# EAGLE board VERSION_2 (EAGLE 9.1.3)
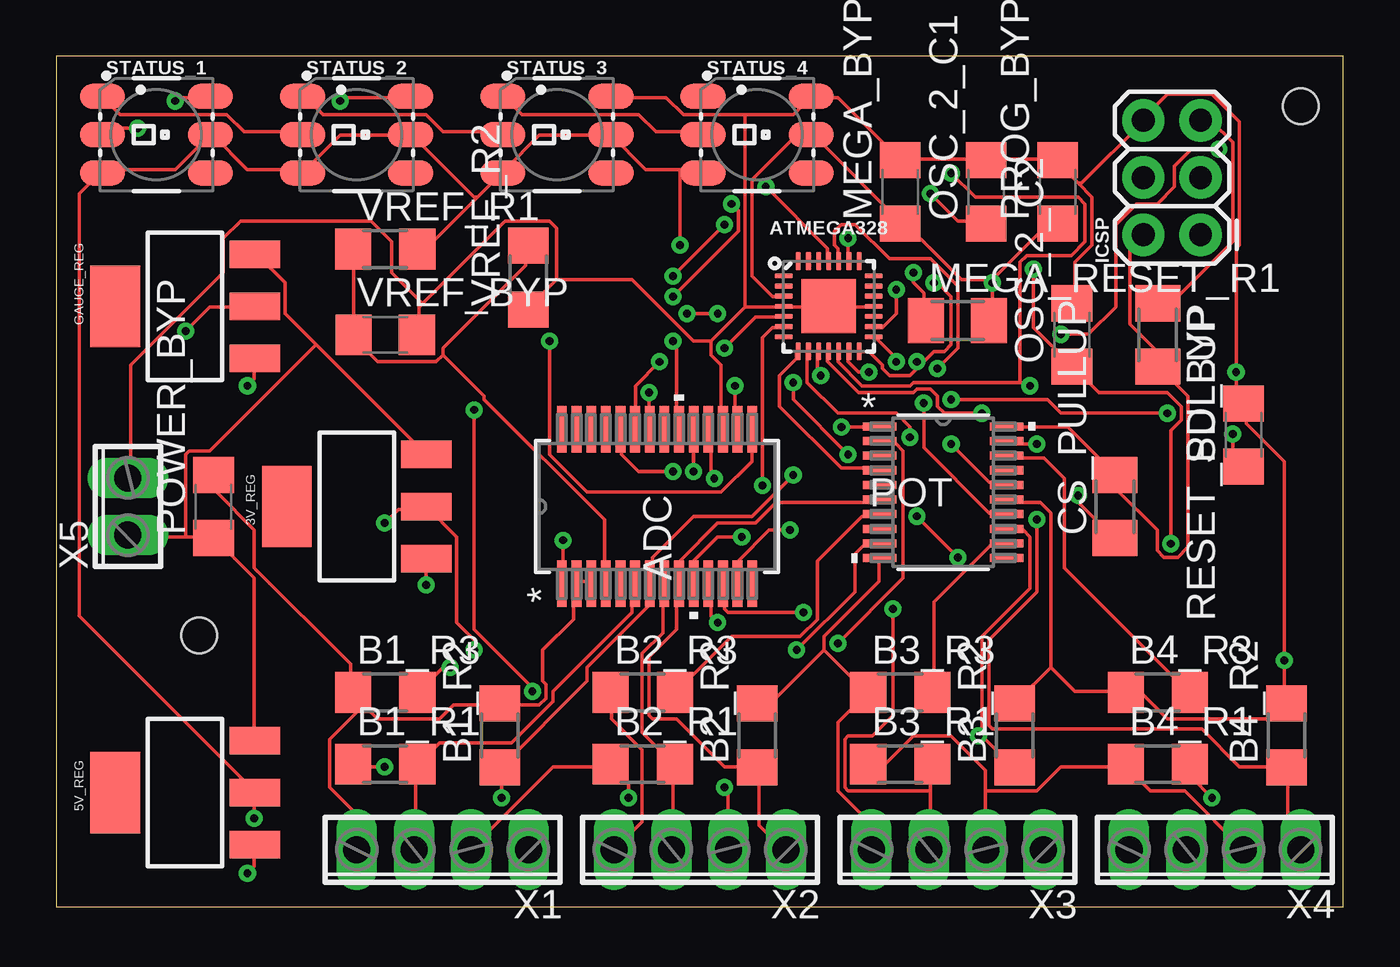
[diagram p0: board, top side]
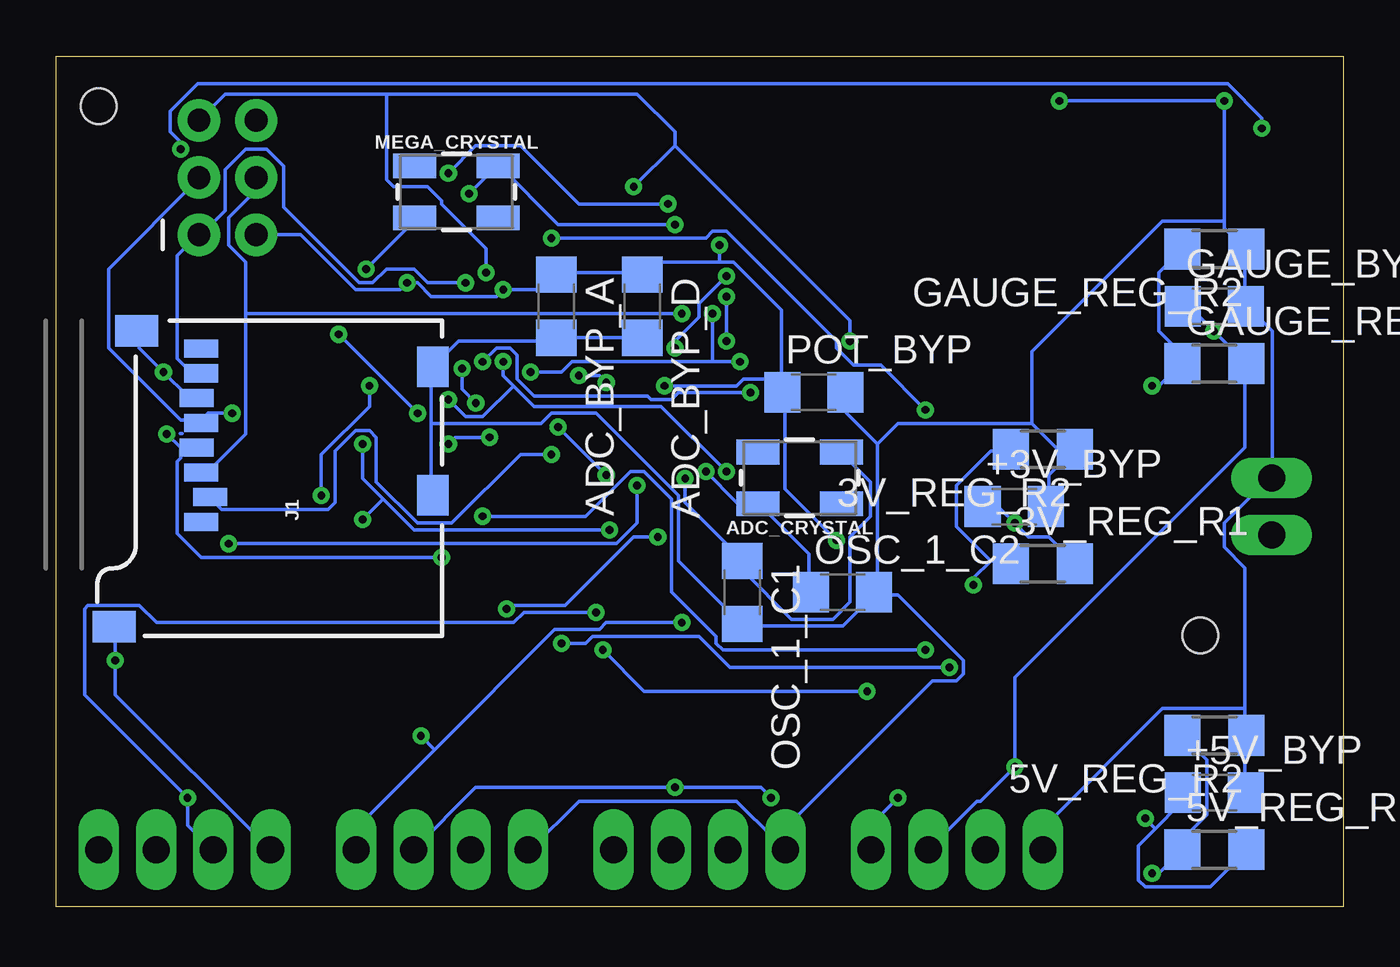
[diagram p1: board, bottom side, seen from below]

Size 57.13 x 37.77 mm. Coordinates in mm from the lower left corner, seen from the top.
Outline: 0,0 57.13,0 57.13,37.77 0,37.77 0,0
Copper layers (1*16): Top 0.035mm / dielectric 1.5mm / Bottom 0.035mm
Design rules "default": minimum track width 6mil, minimum drill 0.35mm, track to track 6mil, track to pad 6mil, pad to pad 6mil, via to via 6mil, smd to smd 6mil, copper to edge 40mil, drill to drill 6mil, minimum pad ring 10mil, minimum via ring 8mil, stop-mask expansion 4mil, vias tented up to drill 0mil, thermal gap 10mil
Holes 1.59 mm at 55.24,35.56 6.35,12.06

## Footprints (pad centres in the part's own frame; a part is rotated, then mirrored left to right if it is on the bottom)
SOT223 = smd 1.219 x 2.235: 1 -2.311,-3.099; 2 0,-3.099; 3 2.311,-3.099 | smd 3.6 x 2.2: 4 0,3.099
R1206 = smd 1.6 x 1.803: 1 -1.422,0; 2 1.422,0
C1206 = smd 1.6 x 1.8: 1 -1.4,0; 2 1.4,0
DB28 = smd 2.057 x 0.432: 1 -3.429,4.225; 2 -3.429,3.575; 3 -3.429,2.925; 4 -3.429,2.275; 5 -3.429,1.625; 6 -3.429,0.975; 7 -3.429,0.325; 8 -3.429,-0.325; 9 -3.429,-0.975; 10 -3.429,-1.625; 11 -3.429,-2.275; 12 -3.429,-2.925; 13 -3.429,-3.575; 14 -3.429,-4.225; 15 3.429,-4.225; 16 3.429,-3.575; 17 3.429,-2.925; 18 3.429,-2.275; 19 3.429,-1.625; 20 3.429,-0.975; 21 3.429,-0.325; 22 3.429,0.325; 23 3.429,0.975; 24 3.429,1.625; 25 3.429,2.275; 26 3.429,2.925; 27 3.429,3.575; 28 3.429,4.225
CRYSTAL-SMD-5X3.2-4PAD = smd 1.9 x 1.1: 1 -1.85,-1.15; 2 1.85,-1.15; 3 1.85,1.15; 4 -1.85,1.15
VQFN-28 = smd 0.82 x 0.24: 1 -2,1.35; 2 -2,0.9; 3 -2,0.45; 4 -2,0; 5 -2,-0.45; 6 -2,-0.9; 7 -2,-1.35; 15 2,-1.35; 16 2,-0.9; 17 2,-0.45; 18 2,0; 19 2,0.45; 20 2,0.9; 21 2,1.35 | smd 0.24 x 0.82: 8 -1.35,-2; 9 -0.9,-2; 10 -0.45,-2; 11 0,-2; 12 0.45,-2; 13 0.9,-2; 14 1.35,-2; 22 1.35,2; 23 0.9,2; 24 0.45,2; 25 0,2; 26 -0.45,2; 27 -0.9,2; 28 -1.35,2 | smd 2.4 x 2.4: PAD 0,0
M1206 = smd 1.6 x 2: 1 -1.4,0; 2 1.4,0
2X3 = drill 1.016 pad 1.88: 1 0,0; 2 0,2.54; 3 2.54,0; 4 2.54,2.54; 5 5.08,0; 6 5.08,2.54
MICRO-SD-SOCKET = smd 1.8 x 1.4: CD1 -2.05,0.4; CD2 -7.75,0.4 | smd 0.8 x 1.5: CS -7.84,10.3; DI -6.74,10.7; DO -2.34,10.7; GND -3.44,10.9; RSV1 -8.94,10.7; RSV2 -1.24,10.7; SCLK -4.54,10.7; VCC -5.64,10.9 | smd 1.4 x 1.9: GND1 -13.6,14.55; GND3 -0.45,13.55
RU_20 = smd 1.473 x 0.356: 1 -2.819,2.925; 2 -2.819,2.275; 3 -2.819,1.625; 4 -2.819,0.975; 5 -2.819,0.325; 6 -2.819,-0.325; 7 -2.819,-0.975; 8 -2.819,-1.625; 9 -2.819,-2.275; 10 -2.819,-2.925; 11 2.819,-2.925; 12 2.819,-2.275; 13 2.819,-1.625; 14 2.819,-0.975; 15 2.819,-0.325; 16 2.819,0.325; 17 2.819,0.975; 18 2.819,1.625; 19 2.819,2.275; 20 2.819,2.925
LED-TRICOLOR-5050-IC = smd 2 x 1.1: 1 -2.4,1.7; 2 -2.4,0; 3 -2.4,-1.7; 4 2.4,-1.7; 5 2.4,0; 6 2.4,1.7
4POL254 = drill 1.2 long: 1 -3.81,0; 2 -1.27,0; 3 1.27,0; 4 3.81,0
2POL254 = drill 1.2 long: 1 -1.27,0; 2 1.27,0

## Placement (x,y rotation side)
3V_REG  [SOT223]  13.34,17.78 90 top
3V_REG_R1  240  [R1206]  13.34,15.24 0 bottom
3V_REG_R2  390  [R1206]  13.34,20.32 180 bottom
5V_REG  [SOT223]  5.71,5.08 90 top
5V_REG_R1  240  [R1206]  5.71,2.54 0 bottom
5V_REG_R2  720  [R1206]  5.71,7.62 180 bottom
+3V_BYP  22uF  [C1206]  14.61,17.78 0 bottom
+5V_BYP  22uF  [C1206]  5.71,5.08 0 bottom
ADC  ADS1256IDBR  [DB28]  26.67,17.78 90 top
ADC_BYP_A  22uF  [C1206]  34.92,26.67 270 bottom
ADC_BYP_D  22uF  [C1206]  31.11,26.67 270 bottom
ADC_CRYSTAL  8MHz  [CRYSTAL-SMD-5X3.2-4PAD]  24.13,19.05 180 bottom
ATMEGA328  ATMEGA328P_VQFNVQFN  [VQFN-28]  34.29,26.67 0 top
B1_R1  350  [R1206]  14.61,6.35 0 top
B1_R2  370  [R1206]  19.68,7.62 90 top
B1_R3  5k  [R1206]  14.61,9.53 0 top
B2_R1  350  [R1206]  26.04,6.35 0 top
B2_R2  370  [R1206]  31.11,7.62 90 top
B2_R3  5k  [R1206]  26.04,9.53 0 top
B3_R1  350  [R1206]  37.47,6.35 0 top
B3_R2  370  [R1206]  42.55,7.62 90 top
B3_R3  5k  [R1206]  37.47,9.53 0 top
B4_R1  350  [R1206]  48.9,6.35 0 top
B4_R2  370  [R1206]  54.61,7.62 90 top
B4_R3  5k  [R1206]  48.9,9.53 0 top
CS_PULLUP  1K  [M1206]  46.99,17.78 90 top
GAUGE_BYP  22uF  [C1206]  5.71,26.67 0 bottom
GAUGE_REG  [SOT223]  5.71,26.67 90 top
GAUGE_REG_R1  240  [R1206]  5.71,24.13 0 bottom
GAUGE_REG_R2  ??  [R1206]  5.71,29.21 180 bottom
ICSP  [2X3]  50.8,29.84 90 top
J1  MICRO-SD_CARD_SOCKET  [MICRO-SD-SOCKET]  40.01,26.04 90 bottom
MEGA_BYP  22uF  [C1206]  37.47,31.75 90 top
MEGA_CRYSTAL  16MHz  [CRYSTAL-SMD-5X3.2-4PAD]  39.37,31.75 0 bottom
MEGA_RESET_R1  10k  [M1206]  40.01,26.04 0 top
OSC_1_C1  22pF  [C1206]  26.67,13.97 270 bottom
OSC_1_C2  22pF  [C1206]  22.23,13.97 0 bottom
OSC_2_C1  22uF  [C1206]  41.27,31.75 90 top
OSC_2_C2  22uF  [C1206]  45.09,25.4 90 top
POT  AD5254BRUZ1  [RU_20]  39.37,18.41 0 top
POT_BYP  22uF  [C1206]  23.5,22.86 0 bottom
POWER_BYP  22uF  [C1206]  6.99,17.78 90 top
PROG_BYP  22uF  [C1206]  44.45,31.75 90 top
RESET_PULLUP  1K  [M1206]  48.9,25.4 270 top
SD_BYP  22uF  [C1206]  52.7,20.95 90 top
STATUS_1  WS2812  [LED-TRICOLOR-5050-IC]  4.45,34.29 0 top
STATUS_2  WS2812  [LED-TRICOLOR-5050-IC]  13.34,34.29 0 top
STATUS_3  WS2812  [LED-TRICOLOR-5050-IC]  22.23,34.29 0 top
STATUS_4  WS2812  [LED-TRICOLOR-5050-IC]  31.11,34.29 0 top
VREF_BYP  22uF  [C1206]  14.61,25.4 0 top
VREF_R1  240  [R1206]  14.61,29.21 0 top
VREF_R2  27  [R1206]  20.95,27.94 90 top
X1  [4POL254]  17.14,2.54 180 top
X2  [4POL254]  28.57,2.54 180 top
X3  [4POL254]  40.01,2.54 180 top
X4  [4POL254]  51.44,2.54 180 top
X5  [2POL254]  3.17,17.78 90 top

## Library data of the parts
3V_REG 5V_REG GAUGE_REG = SparkFun-IC-Power
3V_REG_R1 3V_REG_R2 5V_REG_R1 5V_REG_R2 GAUGE_REG_R1 GAUGE_REG_R2 = rcl; SPICEPREFIX: R
+3V_BYP +5V_BYP ADC_BYP_A ADC_BYP_D B1_R1-B1_R3 B2_R1-B2_R3 B3_R1-B3_R3 B4_R1-B4_R3 CS_PULLUP GAUGE_BYP MEGA_BYP MEGA_RESET_R1 OSC_1_C1 OSC_1_C2 OSC_2_C1 OSC_2_C2 POT_BYP POWER_BYP PROG_BYP RESET_PULLUP SD_BYP VREF_BYP VREF_R1 VREF_R2 = resistor
ADC = ADS1256; MANUFACTURER_PART_NUMBER: ADS1256IDBR; VENDOR: Texas Instruments
ADC_CRYSTAL MEGA_CRYSTAL = SparkFun-Clocks; PROD_ID: XTAL-09431
ATMEGA328 = SparkFun-IC-Microcontroller
ICSP = SparkFun-Connectors; PROD_ID: CONN-11566
J1 = SparkFun-Connectors; PROD_ID: CONN-07820; SF_ID: PRT-00127
POT = AD5254 Digital Potentiometer; MANUFACTURER_PART_NUMBER: AD5254BRUZ1; VENDOR: Analog Devices Inc
STATUS_1-STATUS_4 = SparkFun-LED; PROD_ID: DIO-11598
X1-X5 = con-phoenix-254; OC_FARNELL: unknown; OC_NEWARK: unknown

## Nets
+3V: 3V_REG.2 3V_REG_R1.2 +3V_BYP.1 J1.VCC SD_BYP.1
+5V: 5V_REG.2 5V_REG_R1.2 +5V_BYP.1 ADC.1 ADC.16 ADC_BYP_A.1 ADC_BYP_D.1 ATMEGA328.3 ATMEGA328.16 CS_PULLUP.2 ICSP.2 MEGA_BYP.1 MEGA_RESET_R1.2 POT.20 POT_BYP.1 PROG_BYP.1 RESET_PULLUP.2 STATUS_1.3 STATUS_1.5 STATUS_2.3 STATUS_2.5 STATUS_3.3 STATUS_3.5 STATUS_4.3 STATUS_4.5 VREF_R1.2
+V: B1_R1.1 B2_R1.1 B3_R1.1 B4_R1.1 GAUGE_BYP.1 GAUGE_REG.2 GAUGE_REG_R1.2 X1.2 X2.2 X3.2 X4.2
B1_+: ADC.6 B1_R1.2 X1.3
B1_-: ADC.7 B1_R2.1 POT.1 X1.1
B2_+: ADC.8 B2_R1.2 X2.3
B2_-: ADC.9 B2_R2.1 POT.6 X2.1
B3_+: ADC.10 B3_R1.2 X3.3
B3_-: ADC.11 B3_R2.1 POT.13 X3.1
B4_+: ADC.12 B4_R1.2 X4.3
B4_-: ADC.13 B4_R2.1 POT.19 X4.1
CS: ADC.20 ATMEGA328.12 CS_PULLUP.1
GND: 3V_REG_R2.1 5V_REG_R2.1 +3V_BYP.2 +5V_BYP.2 ADC.2 ADC.3 ADC.17 ADC_BYP_A.2 ADC_BYP_D.2 ATMEGA328.4 ATMEGA328.18 ATMEGA328.PAD B1_R2.2 B1_R3.1 B2_R2.2 B2_R3.1 B3_R2.2 B3_R3.1 B4_R2.2 B4_R3.1 GAUGE_BYP.2 GAUGE_REG_R2.1 ICSP.6 J1.CD1 J1.CD2 J1.GND J1.GND1 J1.GND3 MEGA_BYP.2 OSC_1_C1.2 OSC_1_C2.2 OSC_2_C1.2 OSC_2_C2.2 POT.10 POT.15 POT_BYP.2 POWER_BYP.2 PROG_BYP.2 SD_BYP.2 STATUS_1.6 STATUS_2.6 STATUS_3.6 STATUS_4.6 VREF_BYP.2 VREF_R2.1 X1.4 X2.4 X3.4 X4.4 X5.2
MISO: ADC.22 ATMEGA328.14 ICSP.1 J1.DO
MOSI: ADC.23 ATMEGA328.13 ICSP.4 J1.DI
N$2: ADC.19 ADC_CRYSTAL.3 OSC_1_C2.1
N$3: ADC.18 ADC_CRYSTAL.1 OSC_1_C1.1
N$4: ATMEGA328.5 MEGA_CRYSTAL.3 OSC_2_C1.1
N$5: ATMEGA328.6 MEGA_CRYSTAL.1 OSC_2_C2.1
N$8: 5V_REG.1 5V_REG_R1.1 5V_REG_R2.2
N$12: 3V_REG.1 3V_REG_R1.1 3V_REG_R2.2
N$14: STATUS_1.1 STATUS_2.2
N$15: STATUS_2.1 STATUS_3.2
N$16: STATUS_3.1 STATUS_4.2
N$20: GAUGE_REG.1 GAUGE_REG_R1.1 GAUGE_REG_R2.2
POT1: B1_R3.2 POT.2
POT2: B2_R3.2 POT.7
POT3: B3_R3.2 POT.12
POT4: B4_R3.2 POT.18
POT_A0: ATMEGA328.8 POT.4
POT_A1: ATMEGA328.9 POT.16
RESET: ADC.15 ATMEGA328.25 ICSP.5 MEGA_RESET_R1.1 RESET_PULLUP.1
SCK: ADC.24 ATMEGA328.15 ICSP.3 J1.SCLK
SCL: ATMEGA328.24 POT.14
SD_CARD_SELECT: ATMEGA328.10 J1.CS
SDA: ATMEGA328.23 POT.9
STATUS_IN: ATMEGA328.11 STATUS_1.2
VIN: 3V_REG.3 5V_REG.3 GAUGE_REG.3 POWER_BYP.1 X5.1
VREF: ADC.4 VREF_BYP.1 VREF_R1.1 VREF_R2.2

## Tracks (layer width: path | path; a pad name or v marks a point on that pad's centre or on a via)
+3V  (via drill 0.35)
  Top 0.152: v52.22,21.01 52.22,20.09 52.68,19.63 SD_BYP.1 | v14.58,17.04 15.19,17.65 16.41,17.65 3V_REG.2 17.78,16.43 17.78,12.62 18.54,11.86 v18.54,11.4 | v38.2,17.35 v40.03,15.52
  Bottom 0.152: v52.22,21.01 51.61,20.4 51.61,19.94 51.77,19.79 51.77,16.59 50.7,15.52 v40.03,15.52 | 51.64,21.03 51.54,21.03 | +3V_BYP.1 15.95,17.65 15.19,17.65 v14.58,17.04 13.97,16.43 13.06,16.43 11.99,15.37 3V_REG_R1.2 | v38.2,17.35 33.63,17.35 31.65,19.33 31.04,19.33 29.82,18.11 29.82,13.99 27.84,12.01 27.84,11.71 27.53,11.4 v18.54,11.4
+5V  (via drill 0.35)
  Top 0.152: POT.20 42.32,21.31 44.91,21.31 46.89,19.33 CS_PULLUP.2 47.04,19.18 47.04,18.57 48.87,16.74 48.87,15.82 49.17,15.52 49.78,15.52 50.24,15.98 50.24,22.68 49.02,23.9 RESET_PULLUP.2 48.87,24.05 48.87,24.66 47.65,25.88 47.65,29.23 ICSP.2 | 41.55,27.86 43.99,30.3 44.45,30.3 PROG_BYP.1 | 41.55,27.86 v41.55,27.71 41.55,26.04 MEGA_RESET_R1.2 | ATMEGA328.3 32.26,27.1 31.8,27.1 30.89,28.02 30.89,32.28 32.87,34.27 33.48,34.27 STATUS_4.5 33.63,34.27 37.44,30.45 MEGA_BYP.1 37.59,30.45 40.18,27.86 41.55,27.86 | v37.29,27.41 37.29,26.34 36.68,25.73 36.37,25.73 ATMEGA328.16 | v22.5,16.28 22.5,14.45 ADC.1 | v30.12,23.14 30.12,21.31 ADC.16 | 27.69,32.74 26.16,32.74 24.64,34.27 STATUS_3.5 24.49,34.27 21.44,34.27 19.91,32.74 STATUS_3.3 19.76,32.59 18.69,31.52 | 27.69,32.74 28.6,32.74 STATUS_4.3 | 18.69,31.52 16.41,29.23 16.1,29.23 VREF_R1.2 | 18.69,31.52 18.54,31.52 15.8,34.27 STATUS_2.5 15.65,34.27 12.6,34.27 11.07,32.74 STATUS_2.3 10.92,32.74 8.48,32.74 6.96,34.27 STATUS_1.5 6.81,34.27 5.28,32.74 2.08,32.74 STATUS_1.3 1.93,32.59 1.02,31.67 1.02,12.93 8.79,5.16 5V_REG.2 8.79,5 v8.79,3.94 | 27.69,32.74 v27.69,29.39
  Bottom 0.152: 24.94,23.44 24.94,26.49 27.08,28.63 27.69,28.63 | 24.94,23.44 24.94,22.99 POT_BYP.1 | 27.69,28.63 30.58,28.63 31.04,28.17 ADC_BYP_D.1 31.19,28.17 34.85,28.17 ADC_BYP_A.1 35,28.02 35.61,27.41 v37.29,27.41 37.59,27.1 40.49,27.1 41.1,27.71 v41.55,27.71 41.86,27.41 43.84,27.41 46.28,29.84 ICSP.2 | v22.5,16.28 24.79,18.57 24.79,22.84 POT_BYP.1 | v30.12,23.14 26.92,23.14 26.62,23.44 24.94,23.44 | 24.94,23.44 POT_BYP.1 | 8.33,3.48 9.09,2.72 9.09,1.19 8.79,0.89 5.89,0.89 4.37,2.41 5V_REG_R1.2 | 8.33,3.48 7.26,4.55 7.26,5 +5V_BYP.1 | 8.33,3.48 v8.79,3.94 | v27.69,29.39 27.69,28.63
+V  (via drill 0.35)
  Top 0.152: 41.25,5.16 41.25,2.56 X3.2 | 41.25,5.16 41.25,6.07 39.73,7.59 38.05,7.59 36.83,6.38 36.07,6.38 B3_R1.1 | 41.25,5.16 43.54,5.16 44.6,6.22 47.35,6.22 B4_R1.1 47.5,6.22 48.56,5.16 50.09,5.16 X4.2 | v29.67,5.31 29.82,5.16 29.82,2.56 X2.2 | v5.74,25.58 6.81,26.64 8.79,26.64 GAUGE_REG.2 | v14.58,6.22 13.21,6.22 B1_R1.1 | X1.2 18.39,2.56 22.05,6.22 24.49,6.22 B2_R1.1 24.64,6.22 25.4,5.46 v25.4,4.85
  Bottom 0.152: X3.2 38.51,5.31 v29.67,5.31 25.86,5.31 v25.4,4.85 | GAUGE_BYP.1 7.11,26.64 6.81,26.64 v5.74,25.58 4.37,24.21 GAUGE_REG_R1.2 4.37,24.05 4.37,20.4 14.58,10.19 v14.58,6.22 16.1,4.7 16.26,4.7 X1.2
B1_+
  Top 0.152: X1.3 15.95,2.56 15.95,6.22 B1_R1.2 16.1,6.38 17.02,7.29 20.22,7.29 22.05,9.12 22.05,9.58 25.55,13.08 25.55,14.3 ADC.6
B1_-  (via drill 0.35)
  Top 0.152: v34.85,21.31 36.52,21.31 POT.1 | v32.72,19.18 30.89,17.35 28.3,17.35 26.47,15.52 26.47,14.45 ADC.7 26.31,14.3 26.31,13.39 23.57,10.64 23.57,10.03 19.76,6.22 B1_R2.1 19.76,6.07 v19.76,4.85
  Bottom 0.152: v32.72,19.18 v34.85,21.31 | v19.76,4.85 20.83,3.79 20.83,2.56 X1.1
B2_+
  Top 0.152: X2.3 27.38,2.56 27.38,6.22 B2_R1.2 27.38,6.38 26.01,7.75 26.01,11.25 26.92,12.17 26.92,14.3 ADC.8
B2_-
  Top 0.152: X2.1 32.26,2.56 31.19,3.63 31.19,6.07 B2_R2.1 31.04,6.22 29.67,6.22 27.53,8.36 26.47,8.36 26.31,8.51 26.31,11.1 27.53,12.32 27.53,14.3 ADC.9 27.69,14.45 27.69,15.37 29.36,17.04 31.04,17.04 31.95,17.96 36.52,17.96 POT.6
B3_+  (via drill 0.35)
  Top 0.152: 38.81,5.16 38.81,2.56 X3.3 | 38.81,5.16 38.81,6.22 B3_R1.2 | v30.43,16.43 29.36,16.43 28.3,15.37 28.3,14.45 ADC.10 | v37.13,13.23 37.13,8.51 36.22,7.59 35.15,7.59 35,7.44 35,5.31 35.15,5.16 38.81,5.16
  Bottom 0.152: v30.43,16.43 31.5,16.43 34.54,13.39 36.98,13.39 v37.13,13.23
B3_-  (via drill 0.35)
  Top 0.152: 41.1,7.59 41.1,12.01 43.23,14.15 43.23,16.43 42.93,16.74 42.32,16.74 POT.13 | 41.1,7.59 42.47,6.22 B3_R2.1 | v29.36,12.62 29.06,12.93 29.06,14.3 ADC.11 | v40.95,7.59 41.1,7.59
  Bottom 0.152: v29.36,12.62 32.72,12.62 33.02,12.32 35,12.32 40.34,6.99 | 40.34,6.99 43.69,3.63 43.69,2.56 X3.1 | 40.34,6.99 v40.95,7.59
B4_+  (via drill 0.35)
  Top 0.152: v51.31,4.85 50.39,5.77 50.39,6.22 B4_R1.2 | v33.17,13.08 29.82,13.08 29.67,13.23 29.67,14.3 ADC.12
  Bottom 0.152: X4.3 50.24,2.56 51.31,3.63 v51.31,4.85 55.88,9.42 55.88,13.23 55.73,13.39 53.44,13.39 52.68,12.62 36.83,12.62 36.37,13.08 v33.17,13.08
B4_-  (via drill 0.35)
  Top 0.152: X4.1 55.12,2.56 54.66,3.02 54.66,6.07 B4_R2.1 54.51,6.22 52.53,6.22 50.85,7.9 41.55,7.9 41.4,8.05 41.4,11.86 43.54,13.99 v43.54,17.2 | v43.54,20.55 42.32,20.55 POT.19 | v32.56,16.74 31.65,16.74 30.28,15.37 30.28,14.45 ADC.13
  Bottom 0.152: v43.54,20.55 43.54,19.02 42.62,18.11 | 42.62,18.11 41.25,16.74 v32.56,16.74 | 42.62,18.11 v43.54,17.2
CS  (via drill 0.35)
  Top 0.152: 42.77,23.29 43.08,23.29 v43.23,23.14 | 42.77,23.29 38.05,23.29 37.9,23.14 35.76,23.14 34.7,24.21 34.7,24.66 ATMEGA328.12 | v45.36,18.26 45.36,17.96 46.89,16.43 CS_PULLUP.1 | v27.38,25.12 27.53,24.97 27.53,21.31 ADC.20 | v27.38,27.1 30.28,30 30.28,30.91 v29.97,31.22 | v39.73,32.59 40.79,31.52 45.36,31.52 45.67,31.22 45.67,29.54 45.06,28.93 43.08,28.93 42.77,28.63 42.77,23.29
  Bottom 0.152: v43.23,23.14 43.23,22.23 45.36,20.09 v45.36,18.26 | v27.38,27.1 v27.38,25.12 | v29.97,31.22 33.93,31.22 36.52,33.81 38.51,33.81 v39.73,32.59
GND  (via drill 0.35)
  Top 0.152: X2.4 26.01,3.79 26.01,6.99 24.64,8.36 24.64,9.42 B2_R3.1 | 34.09,11.4 34.09,12.01 36.52,14.45 36.52,15.37 POT.10 | 34.09,11.4 35.92,9.58 B3_R3.1 35.92,9.42 34.7,8.2 34.7,5.16 36.07,3.79 36.07,2.56 X3.4 | 34.09,11.4 31.8,9.12 31.19,9.12 B2_R2.2 | ADC.3 23.72,14.45 23.11,14.45 ADC.2 22.96,14.3 22.96,12.78 21.59,11.4 21.59,10.03 21.74,9.88 21.74,9.27 21.44,8.97 19.76,8.97 B1_R2.2 19.61,8.97 17.63,8.97 17.02,8.36 14.28,8.36 13.66,8.97 | POWER_BYP.2 7.11,19.18 7.11,18.41 8.79,16.74 8.79,15.06 13.06,10.79 13.06,9.58 B1_R3.1 | 13.66,8.97 13.21,9.42 B1_R3.1 | 13.66,8.97 12.14,7.44 12.14,5.31 13.21,4.24 13.21,2.56 X1.4 | 13.66,8.97 B1_R3.1 | v5.28,35.79 5.44,35.94 6.81,35.94 STATUS_1.6 | v12.6,35.79 12.75,35.94 15.65,35.94 STATUS_2.6 | 44.15,10.64 44.15,17.5 43.69,17.96 42.32,17.96 POT.15 | 44.15,10.64 42.62,9.12 B3_R2.2 | 44.15,10.64 45.21,9.58 47.35,9.58 B4_R3.1 47.5,9.42 48.26,9.42 49.33,8.36 53.9,8.36 54.51,8.97 B4_R2.2 54.51,9.12 v54.51,10.95 54.51,19.79 52.83,21.46 52.83,22.23 SD_BYP.2 52.68,22.38 52.38,22.68 v52.38,23.75 52.38,29.23 52.53,29.39 52.53,34.87 51.31,36.09 49.33,36.09 48.26,35.03 ICSP.6 48.26,34.87 45.52,32.13 45.36,32.13 | 16.26,26.8 19.91,30.45 21.89,30.45 22.2,30.15 22.2,27.86 | 16.26,26.8 16.1,26.64 16.1,25.43 VREF_BYP.2 | 22.2,27.86 20.98,26.64 VREF_R2.1 | ATMEGA328.18 36.22,26.64 34.39,26.64 ATMEGA328.PAD 34.24,26.64 32.41,26.64 ATMEGA328.4 32.26,26.64 30.58,26.64 | 29.06,25.12 29.06,24.51 29.52,24.05 29.52,21.31 ADC.17 | 30.58,26.64 29.06,25.12 | 22.2,27.86 25.55,27.86 28.3,25.12 29.06,25.12 | 30.58,35.18 32.72,35.18 33.48,35.94 STATUS_4.6 33.63,35.94 34.7,35.94 37.44,33.2 MEGA_BYP.2 37.59,33.2 41.25,33.2 OSC_2_C1.2 41.4,33.2 44.45,33.2 PROG_BYP.2 44.45,33.05 45.36,32.13
  Top 0.152: 30.58,35.18 27.84,35.18 27.08,35.94 24.64,35.94 STATUS_3.6 | 45.36,32.13 45.97,31.52 45.97,29.39 45.21,28.63 45.21,26.95 OSC_2_C2.2 | 30.58,35.18 30.58,26.64 | 16.26,26.8 14.88,28.17 14.88,29.54 13.97,30.45 8.18,30.45 7.42,29.69 7.42,28.17 3.3,24.05 3.3,19.18 X5.2
  Bottom 0.152: 25.25,3.02 26.92,4.7 33.93,4.7 36.07,2.56 X3.4 | 25.25,3.02 X2.4 24.79,2.56 | ADC_BYP_D.2 31.19,25.27 34.85,25.27 ADC_BYP_A.2 35,25.12 39.27,25.12 40.34,24.05 J1.CD1 40.49,23.9 40.49,21.46 | 40.49,21.46 40.49,18.41 J1.CD2 | +3V_BYP.2 13.06,17.8 13.06,19.18 12.29,19.94 13.82,21.46 | 12.62,20.88 12.55,20.95 | OSC_1_C2.2 20.83,13.84 22.2,12.47 26.62,12.47 OSC_1_C1.2 26.77,12.62 29.52,15.37 29.52,18.26 33.17,21.92 35.15,21.92 35.61,21.46 40.49,21.46 | 20.68,20.55 22.05,21.92 22.05,22.84 POT_BYP.2 | 20.68,20.55 20.68,13.99 OSC_1_C2.2 | 13.82,21.46 19.76,21.46 20.68,20.55 | 25.25,3.02 18.24,10.03 17.17,10.03 16.87,10.34 16.87,10.95 19.76,13.84 20.68,13.84 OSC_1_C2.2 | +5V_BYP.2 4.37,5.16 4.37,7.59 5V_REG_R2.1 4.37,7.75 4.37,8.81 | 4.37,8.81 4.37,15.06 5.28,15.98 5.28,17.04 3.3,19.02 X5.2 3.15,19.18 3.15,25.58 4.22,26.64 GAUGE_BYP.2 4.37,26.8 4.37,29.08 GAUGE_REG_R2.1 4.37,29.23 5.28,30.15 5.28,30.45 | 5.28,30.45 v5.28,35.79 v12.6,35.79 | 4.37,8.81 8.03,8.81 13.21,3.63 13.21,2.56 X1.4 | 13.82,21.46 13.82,24.66 8.03,30.45 5.28,30.45 | X4.4 54.51,9.42 v54.51,10.95 54.51,12.32 J1.GND1 | J1.GND 51,22.68 51.31,22.68 v52.38,23.75 53.44,24.82 53.44,25.58 J1.GND3
MISO  (via drill 0.35)
  Top 0.152: 38.35,24.05 38.96,24.66 39.42,24.66 39.73,24.97 39.73,27.1 39.12,27.71 v38.96,27.71 | 38.35,24.05 37.9,23.6 36.98,23.6 36.68,23.9 36.68,24.05 36.07,24.66 35.61,24.66 ATMEGA328.14 | v26.31,22.84 26.31,21.31 ADC.22 | 38.35,24.05 v38.2,24.21
  Bottom 0.152: v38.96,27.71 40.64,27.71 41.25,28.32 42.47,28.32 43.08,27.71 43.69,27.71 47.04,31.06 47.04,32.89 47.8,33.66 48.72,33.66 49.63,32.74 49.63,30.91 50.7,29.84 ICSP.1 50.85,29.84 51.77,28.93 51.77,24.36 51.16,23.75 50.85,23.75 J1.DO | v26.31,22.84 29.52,22.84 29.82,22.53 30.73,22.53 30.89,22.68 35.92,22.68 36.68,23.44 36.68,24.51 36.98,24.82 37.59,24.82 v38.2,24.21
MOSI  (via drill 0.35)
  Top 0.152: v36.07,23.75 35.61,23.75 35.15,24.21 35.15,24.66 ATMEGA328.13 | v26.77,24.21 25.7,23.14 25.7,21.31 ADC.23 | v29.36,26.34 v27.99,26.34
  Bottom 0.152: v36.07,23.75 34.7,23.75 34.24,24.21 27.99,24.21 | v26.77,24.21 27.99,24.21 | 48.72,26.34 48.72,28.63 49.48,29.39 49.48,30.61 48.26,31.83 ICSP.4 | 48.72,26.34 48.72,21.01 50.39,19.33 50.7,19.33 J1.DI | v27.99,26.34 27.99,24.21 | 48.72,26.34 v29.36,26.34
N$2  (via drill 0.35)
  Top 0.152: v28.3,19.33 28.3,21.16 ADC.19
  Bottom 0.152: OSC_1_C2.1 23.72,13.99 23.72,15.67 25.86,17.8 ADC_CRYSTAL.3 26.01,17.96 26.92,17.96 v28.3,19.33
N$3  (via drill 0.35)
  Top 0.152: v29.21,19.02 29.06,19.18 29.06,21.16 ADC.18
  Bottom 0.152: ADC_CRYSTAL.1 22.2,20.09 20.98,18.87 20.98,17.35 21.89,16.43 21.89,13.54 22.66,12.78 24.49,12.78 26.62,14.91 26.62,15.37 OSC_1_C1.1 26.77,15.52 29.21,17.96 v29.21,19.02
N$4  (via drill 0.35)
  Top 0.152: v29.67,24.82 31.04,26.19 32.26,26.19 ATMEGA328.5 | v29.67,30.3 v27.38,28.02 | v38.81,31.67 40.03,30.45 41.25,30.45 OSC_2_C1.1
  Bottom 0.152: v29.67,24.82 29.67,25.12 28.6,26.19 28.6,26.8 v27.38,28.02 | v29.67,30.3 34.85,30.3 37.44,32.89 MEGA_CRYSTAL.3 37.59,32.89 v38.81,31.67
N$5  (via drill 0.35)
  Top 0.152: v31.34,18.72 31.34,25.27 31.8,25.73 32.26,25.73 ATMEGA328.6 | v49.48,16.13 49.48,21.16 49.94,21.61 49.94,22.23 49.33,22.84 46.28,22.84 45.21,23.9 OSC_2_C2.1 45.06,24.05 43.38,25.73 v43.38,28.32
  Bottom 0.152: v31.34,18.72 31.34,17.04 32.26,16.13 v49.48,16.13 | v43.38,28.32 41.25,30.45 MEGA_CRYSTAL.1
N$8  (via drill 0.35)
  Top 0.152: v8.48,1.5 8.79,1.8 8.79,2.72 5V_REG.1
  Bottom 0.152: 5V_REG_R2.2 7.11,7.59 6.04,6.53 6.04,4.09 7.11,3.02 7.11,2.56 5V_REG_R1.1 7.26,2.41 8.18,1.5 v8.48,1.5
N$12  (via drill 0.35)
  Top 0.152: v16.41,14.3 16.41,15.37 3V_REG.1
  Bottom 0.152: 15.65,15.37 14.88,15.37 3V_REG_R1.1 | 15.65,15.37 17.17,16.89 17.17,18.72 15.65,20.24 14.88,20.24 3V_REG_R2.2 | v16.41,14.3 16.41,14.61 15.65,15.37
N$14
  Top 0.152: STATUS_2.2 10.92,34.42 8.33,34.42 7.57,35.18 2.85,35.18 2.08,35.94 STATUS_1.1
N$15
  Top 0.152: STATUS_3.2 19.76,34.42 17.17,34.42 16.41,35.18 11.84,35.18 11.07,35.94 STATUS_2.1
N$16
  Top 0.152: STATUS_4.2 28.6,34.42 26.62,34.42 25.86,35.18 20.68,35.18 19.91,35.94 STATUS_3.1
N$20  (via drill 0.35)
  Top 0.152: v8.48,23.14 8.79,23.44 8.79,24.36 GAUGE_REG.1
  Bottom 0.152: GAUGE_REG_R2.2 7.26,29.08 8.18,28.17 8.18,25.58 7.26,24.66 7.26,24.21 GAUGE_REG_R1.1 7.26,24.05 8.18,23.14 v8.48,23.14
POT1  (via drill 0.35)
  Top 0.152: v34.7,11.71 37.59,14.61 37.59,20.24 37.29,20.55 36.68,20.55 POT.2 | v17.48,10.64 17.17,10.64 16.1,9.58 B1_R3.2
  Bottom 0.152: v34.7,11.71 33.63,11.71 33.33,12.01 28.6,12.01 27.23,10.64 v17.48,10.64
POT2
  Top 0.152: POT.7 36.52,17.35 35.76,17.35 33.78,15.37 33.78,12.78 33.02,12.01 29.97,12.01 27.53,9.58 B2_R3.2
POT3
  Top 0.152: POT.12 42.16,16.13 41.55,16.13 38.96,13.54 38.96,9.58 B3_R3.2
POT4
  Top 0.152: POT.18 42.32,19.94 43.84,19.94 44.76,19.02 44.76,15.06 50.24,9.58 B4_R3.2
POT_A0
  Top 0.152: ATMEGA328.8 32.87,24.66 32.87,24.36 32.11,23.6 32.11,22.23 34.85,19.48 36.52,19.48 POT.4
POT_A1  (via drill 0.35)
  Top 0.152: v37.9,20.85 37.9,21.31 37.29,21.92 34.7,21.92 33.33,23.29 33.33,24.66 ATMEGA328.9 | v39.73,20.55 41.4,18.87 42.16,18.87 POT.16
  Bottom 0.152: v37.9,20.85 39.42,20.85 v39.73,20.55
RESET  (via drill 0.35)
  Top 0.152: v31.5,31.98 34.24,29.23 34.24,28.78 ATMEGA328.25 | v38.05,28.17 38.05,27.71 38.51,27.25 38.51,26.04 MEGA_RESET_R1.1 | RESET_PULLUP.1 49.02,26.95 49.63,26.95 52.22,29.54 52.22,33.96 51.31,34.87 50.85,34.87 ICSP.5 | v21.89,25.12 21.89,20.09 23.57,18.41 29.52,18.41 30.89,19.79 30.89,21.16 ADC.15
  Bottom 0.152: 29.67,33.81 v31.5,31.98 | 29.67,33.81 29.67,34.42 31.34,36.09 42.47,36.09 | 42.47,36.09 49.63,36.09 ICSP.5 | v38.05,28.17 38.05,29.23 40.03,31.22 40.03,31.37 40.64,31.98 42.16,31.98 42.47,32.28 42.47,36.09 | v21.89,25.12 21.89,26.04 29.67,33.81
SCK  (via drill 0.35)
  Top 0.152: v37.29,24.21 37.29,24.36 36.37,25.27 ATMEGA328.15 | v27.38,19.33 25.86,19.33 25.09,20.09 25.09,21.16 ADC.24 | v39.73,22.53 43.99,22.53 44.6,21.92 v49.33,21.92
  Bottom 0.152: v37.29,24.21 37.29,23.6 36.83,23.14 | 36.83,23.14 35.92,22.23 30.28,22.23 v27.38,19.33 | ICSP.3 50.85,32.28 54.81,28.32 54.81,24.82 51.61,21.61 50.85,21.61 J1.SCLK 50.7,21.61 50.39,21.92 v49.33,21.92 | 36.83,23.14 38.2,21.77 38.96,21.77 v39.73,22.53
SCL  (via drill 0.35)
  Top 0.152: v39.12,23.9 40.03,24.82 40.03,27.56 38.81,28.78 36.98,28.78 35.46,30.3 34.85,30.3 34.54,30 34.54,29.39 34.7,29.23 34.7,28.78 ATMEGA328.24 | v38.51,22.38 38.51,20.4 41.4,17.5 42.16,17.5 POT.14
  Bottom 0.152: v39.12,23.9 39.12,22.99 v38.51,22.38
SD_CARD_SELECT  (via drill 0.35)
  Top 0.152: v33.93,23.6 33.78,23.75 33.78,24.66 ATMEGA328.10 | v32.72,23.29 32.72,22.53 v35.15,20.09
  Bottom 0.152: v33.93,23.6 33.02,23.6 v32.72,23.29 | v35.15,20.09 36.52,20.09 39.57,17.04 41.1,17.04 42.93,18.87 42.93,20.85 43.23,21.16 43.84,21.16 44.76,20.24 44.76,17.96 45.06,17.65 49.78,17.65 50.24,18.11 J1.CS
SDA  (via drill 0.35)
  Top 0.152: v35.15,29.69 35.15,28.78 ATMEGA328.23 | v18.54,22.07 18.54,12.32 21.13,9.73 v21.13,9.58 | v32.87,11.4 35.46,13.99 35.46,15.67 35.92,16.13 36.52,16.13 POT.9
  Bottom 0.152: v35.15,29.69 28.3,29.69 27.99,30 27.38,30 22.5,25.12 22.5,24.82 21.74,24.05 20.52,24.05 v18.54,22.07 | v21.13,9.58 31.04,9.58 v32.87,11.4
STATUS_IN  (via drill 0.35)
  Top 0.152: v41.1,21.92 39.42,21.92 39.12,22.23 39.12,22.68 38.81,22.99 38.2,22.99 38.05,22.84 35.61,22.84 34.24,24.21 34.24,24.66 ATMEGA328.11 | v44.6,25.43 45.82,25.43 47.04,26.64 47.04,30.3 47.95,31.22 48.87,31.22 49.63,31.98 49.63,32.89 50.39,33.66 v51.61,33.66 | v3.61,34.57 2.23,34.57 2.08,34.42 STATUS_1.2
  Bottom 0.152: v44.6,25.43 v41.1,21.92 | v51.61,33.66 51.61,33.96 52.07,34.42 52.07,35.33 50.85,36.55 5.13,36.55 3.61,35.03 v3.61,34.57
VIN
  Top 0.152: 11.53,24.97 10.16,26.34 10.16,27.71 8.94,28.93 GAUGE_REG.3 | 11.53,24.97 16.41,20.09 3V_REG.3 | 5.74,16.43 3.3,16.43 X5.1 | 5.74,16.43 6.96,16.43 POWER_BYP.1 7.11,16.28 8.79,14.61 8.79,7.44 5V_REG.3 | 11.53,24.97 6.81,20.24 5.89,20.24 5.74,20.09 5.74,16.43
VREF
  Top 0.152: VREF_R1.1 13.21,29.08 13.21,25.43 VREF_BYP.1 13.21,25.27 14.28,24.21 16.87,24.21 17.17,24.51 | 17.17,24.51 17.17,24.82 20.83,28.47 20.83,29.23 VREF_R2.2 | 17.17,24.51 19,22.68 19,22.53 24.33,17.2 24.33,14.45 ADC.4